# EAGLE board issue18515_managed_lib (EAGLE 9.6.2)
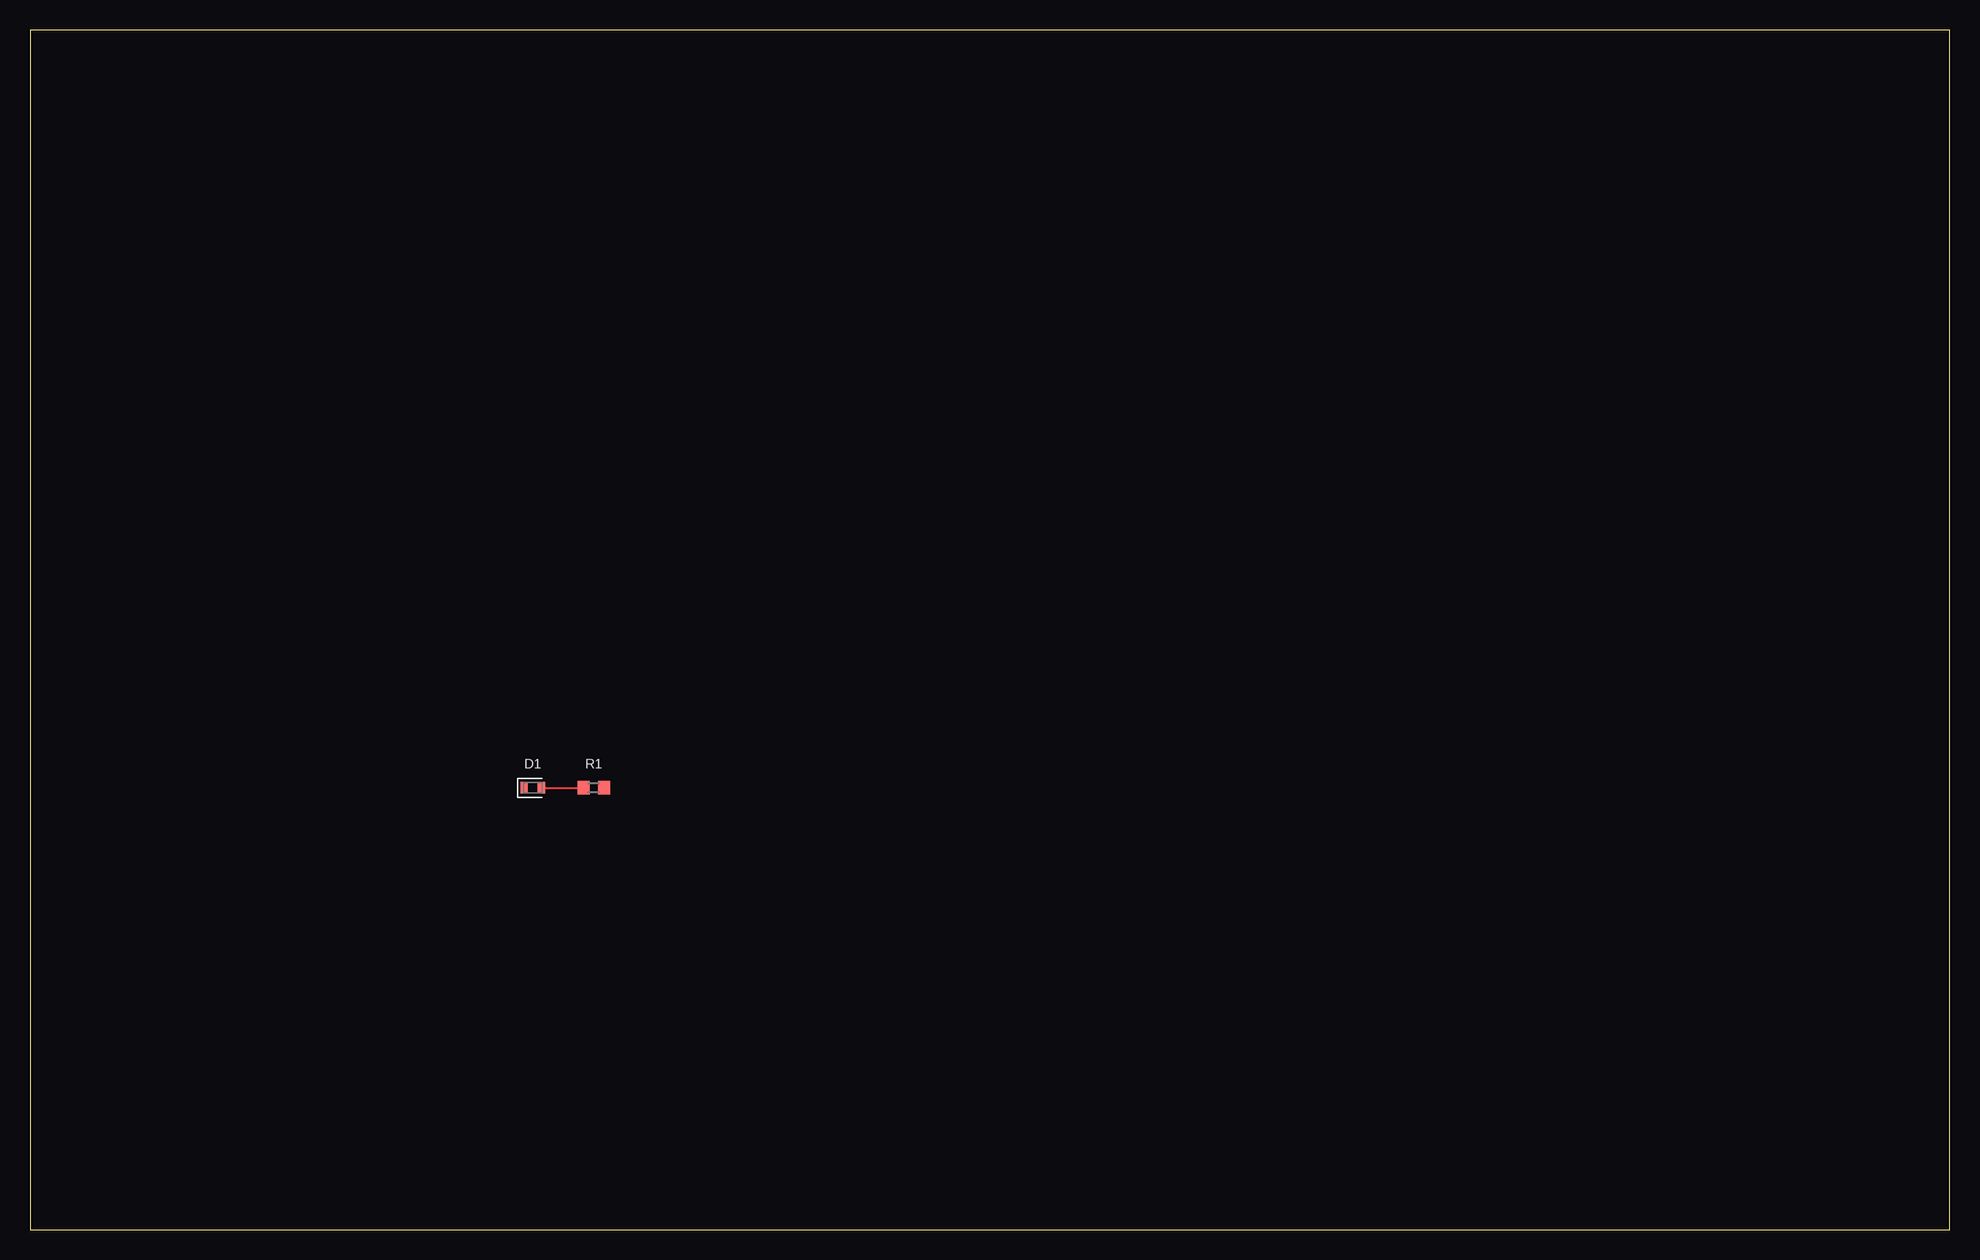
[diagram p0: board, top side]

Size 160 x 100 mm. Coordinates in mm from the lower left corner, seen from the top.
Outline: 0,0 160,0 160,100 0,100 0,0
Copper layers (1*16): Top 0.035mm / dielectric 1.5mm / Bottom 0.035mm
Design rules "default": minimum track width 6mil, minimum drill 0.35mm, track to track 6mil, track to pad 6mil, pad to pad 6mil, via to via 6mil, smd to smd 6mil, copper to edge 40mil, drill to drill 6mil, minimum pad ring 10mil, minimum via ring 8mil, stop-mask expansion 4mil, vias tented up to drill 0mil, thermal gap 10mil

## Footprints (pad centres in the part's own frame; a part is rotated, then mirrored left to right if it is on the bottom)
LED-0603 = smd 0.612 x 0.962: 1 -0.725,0; 2 0.725,0
R0603 = smd 1 x 1.1: 1 -0.85,0; 2 0.85,0

## Placement (x,y rotation side)
D1  CHIP-LED-GREEN  [LED-0603]  41.91,36.83 0 top
R1  [R0603]  46.99,36.83 0 top

## Library data of the parts
D1 = MX_LIB; CURR_RATING: 20mA; GENERIC: Allowed; LCSC_0: C125098; LCSC_2: C125094; LCSC_3: C510025; MFR_0: Lite-on; MFR_2: Lite-on; MFR_3: ROHM; PN_0: LTST-C191KGKT; PN_2: LTST-C190KGKT; PN_3: SML-D12M8WT86; RISK: 1; UNIT_COST: 0.01
R1 = MX_LIB; GENERIC: Allowed; PWR_RATING: 0.1W; RISK: 1; TOLERANCE: 1%; UNIT_COST: 0.02; VTG_RATING: 50V

## Nets
N$1: D1.2 R1.1

## Tracks (layer width: path | path; a pad name or v marks a point on that pad's centre or on a via)
N$1
  Top 0.152: D1.2 R1.1